# Altium PCB 2211B_SysArrosage_Auto_A.PcbDoc (part 2 of 2)
Units mm, origin at the board's own origin, x right, y up, seen from the top; angles counter-clockwise.
Board outline 107 x 107 mm, 2 copper layers (Top Layer, Bottom Layer), stack 1.586 mm thick; 94 components, 69 nets, 297 pads, 129 vias.
Unrouted connection lines stored in the file: 47.
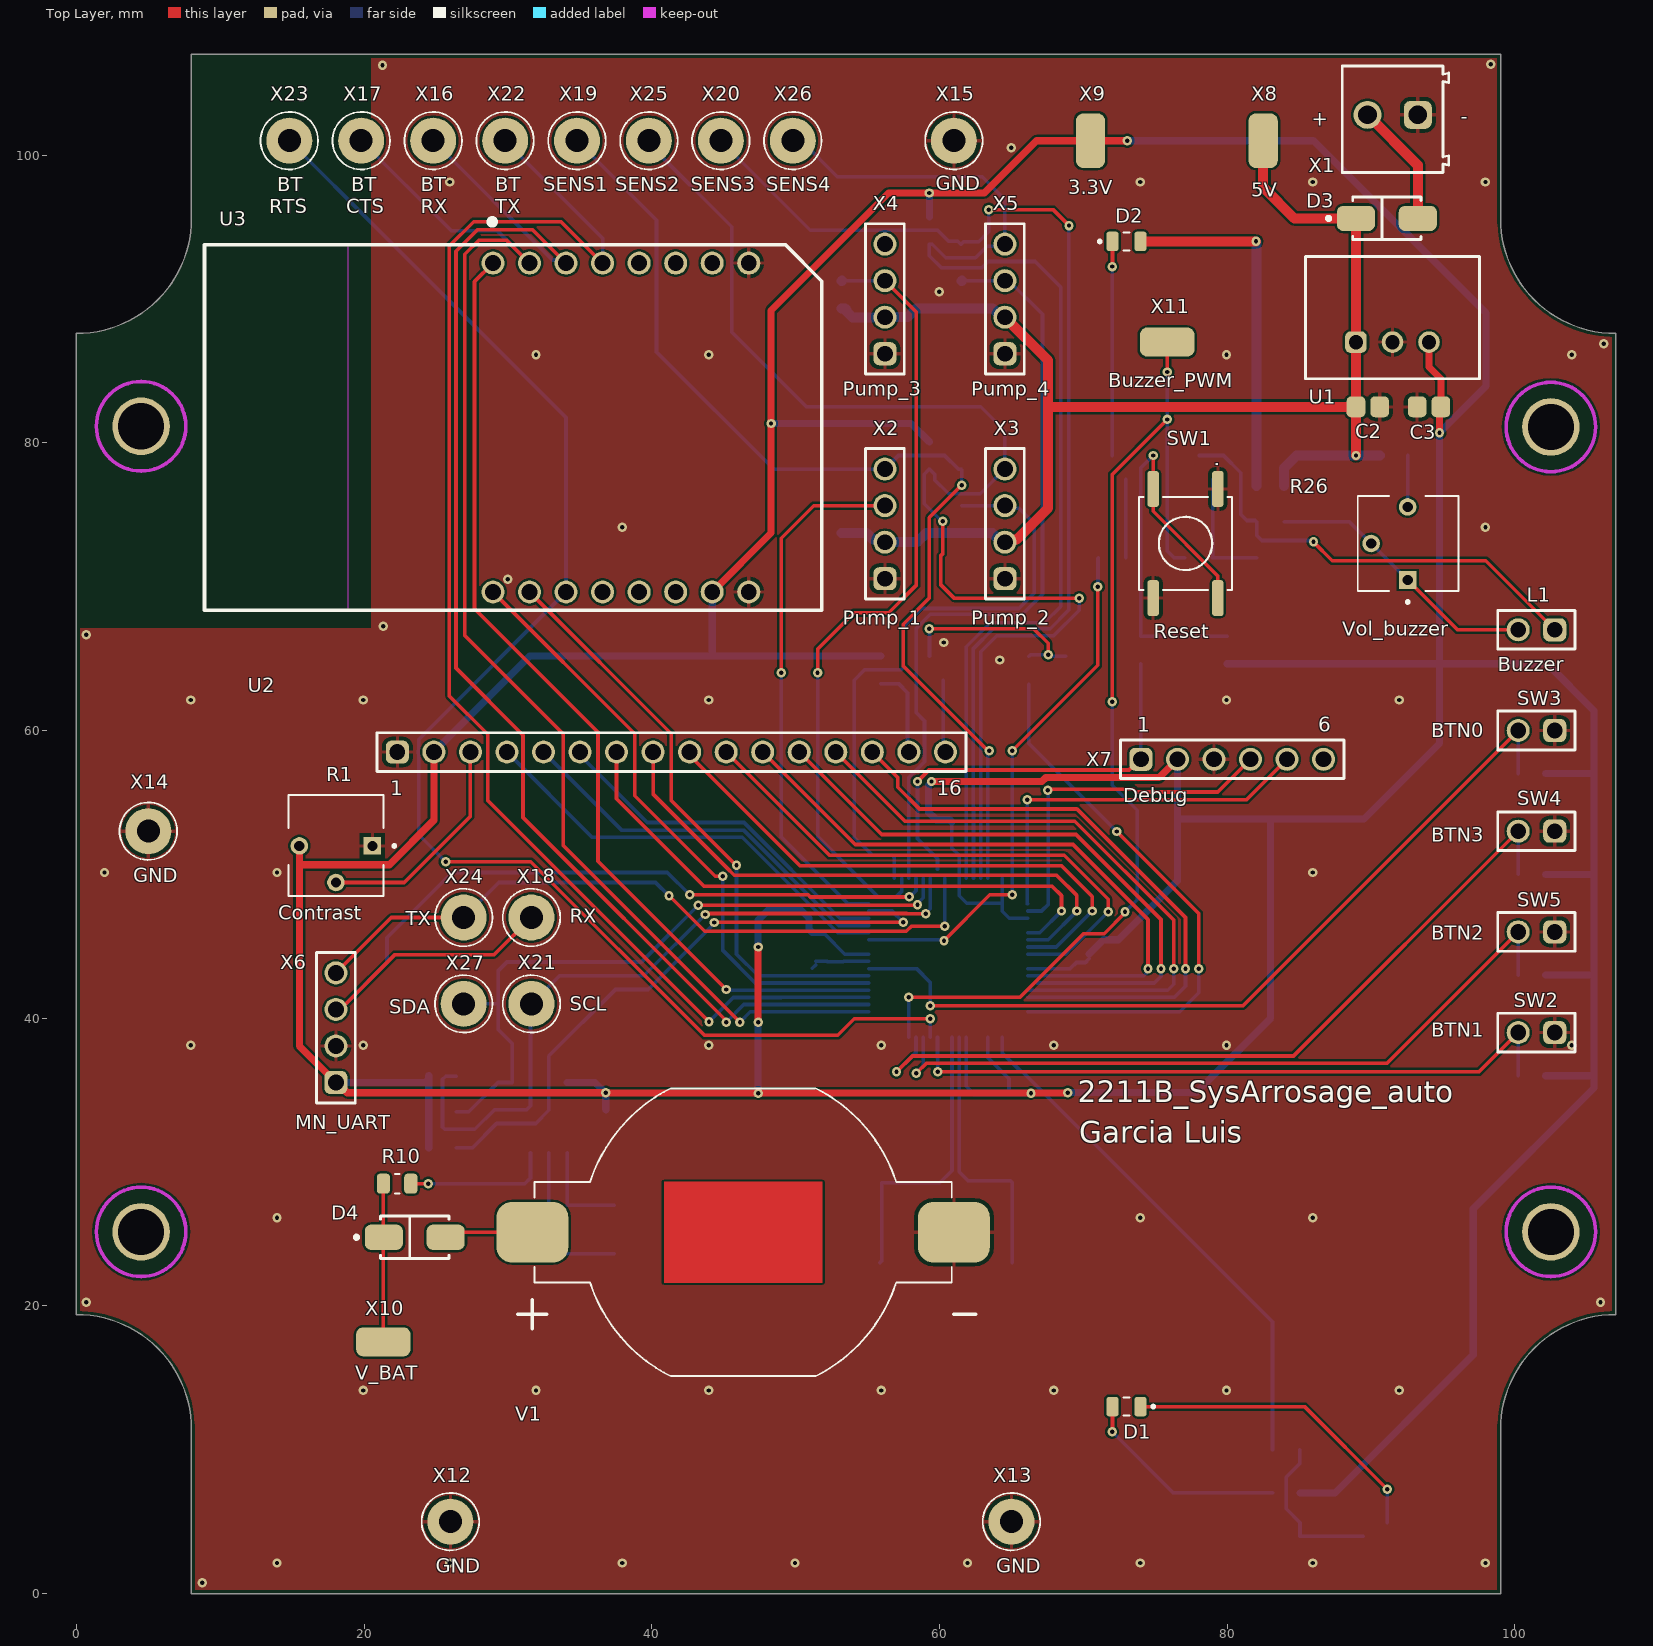
[diagram p0: Top Layer view]

## Via types
v1: diameter 0.65, hole 0.3, Top Layer to Bottom Layer, tented both sides, 66 vias
v2: diameter 0.65, hole 0.3, Top Layer to Bottom Layer, 63 vias

## Nets (pads, with @x,y where several pads share a name; then routed paths per layer and width w, separated by ;. In a path a pad name is that pad's centre, name@x,y a point inside that pad or via, vN(x,y) a via of type N, cw(c..) or ccw(c..) an arc to the next point about the centre after c; other vN are vias at no path point) (continued)
BTN0: (continued)
  Bottom Layer w0.254: U5.55 58.402,43.448 59.365,42.485 v1(59.365,40.855) ; R16.1 SW3.2
BTN1: R17.1 SW2.2 U5.42 | length 46.9
  Top Layer w0.254: v2(59.875,36.27) 97.5,36.27 SW2.2
  Bottom Layer w0.254: U5.42 59.865,37.245 59.875,37.235 v2(59.875,36.27) ; R17.1 SW2.2
BTN2: R19.1 SW5.2 U5.44 | length 51.6
  Top Layer w0.254: v2(58.389,36.175) 59.089,36.875 59.365,36.875 91.105,36.875 SW5.2
  Bottom Layer w0.254: v2(58.389,36.175) 58.389,36.221 58.865,36.697 U5.44 ; R19.1@100.23,43.002 SW5.2
BTN3: R18.1 SW4.2 U5.45 | length 56.1
  Top Layer w0.254: v2(57.015,36.27) 58.121,37.375 84.605,37.375 SW4.2
  Bottom Layer w0.254: v2(57.015,36.27) 58.363,37.618 58.363,38.671 U5.45 ; R18.1 100.23,50.001 SW4.2
Buzzer: R12.2 U5.46 X11.1 | length 73.1
  Top Layer w0.254: v1(57.865,41.458) 65.597,41.458 70.012,45.873 71.445,45.873 72.9,47.328 v2(72.9,47.4) ; v2(72,62) 72,77.795 v2(75.831,81.625) ; v2(75.831,84.92) X11.1
  Bottom Layer w0.254: U5.46 v1(57.865,41.458) ; v2(72,62) 72,56.202 73.738,54.464 73.738,48.238 v2(72.9,47.4) ; v2(75.831,84.92) v2(75.831,81.625) 75.831,72.475 76.305,72 R12.2
Contrast: R1.2 U2.3 | length 15.7
  Top Layer w0.254: R1.2 22.785,49.435 27.39,54.04 U2.3
GND: C2.1 C3.1 C5.1 C6.1 C7.1 C8.1 C9.1 C10.1 C11.1 C12.1 C13.1 C14.1 C15.1 C16.1 D5.1 D6.1 Q1.2 Q2.2 Q3.2 Q4.2 R1.1 R6.1 R13.2 R22.1 R23.1 SW1.1 SW1.3 SW2.1 SW3.1 SW4.1 SW5.1 U1.2 U2.1 U3.8 U3.9 U4.4 U5.9 U5.15 U5.20 U5.25 U5.41 V1.2 X1.1 X2.1 X3.1 X4.1 X5.1 X6.2 X7.3 X12.1 X13.1 X14.1 X15.1
  other v1: 8.75,0.75 13.95,2.125 25.95,2.125 37.95,2.125 49.95,2.125 61.95,2.125 73.95,2.125 85.95,2.125 97.95,2.125 19.95,14.125 31.95,14.125 43.95,14.125 55.95,14.125 67.95,14.125 79.95,14.125 91.95,14.125 0.675,20.25 105.95,20.25 13.95,26.125 73.95,26.125 85.95,26.125 7.95,38.125 19.95,38.125 43.95,38.125 55.95,38.125 67.95,38.125 79.95,38.125 103.95,38.125 1.95,50.125 13.95,50.125 85.95,50.125 7.95,62.125 19.95,62.125 43.95,62.125 79.95,62.125 91.95,62.125 64.178,64.897 60.285,66.121 0.675,66.65 21.34,67.241 29.988,70.504 37.95,74.125 97.95,74.125 31.95,86.125 43.95,86.125 79.95,86.125 103.95,86.125 106.175,86.875 59.988,90.504 25.95,98.125 73.95,98.125 85.95,98.125 97.95,98.125 64.988,100.504 21.275,106.25 98.328,106.325
LCD_BL: R5.1 U5.32 | length 38.8
  Top Layer w0.254: v2(72.325,52.975) 78.025,47.275 v2(78.025,43.445)
  Bottom Layer w0.254: U5.32 76.707,40.448 78.025,41.767 v2(78.025,43.445) ; 66.215,59.365 R5.1@66.215,63.225 ; 66.215,59.365 66.215,59.085 66.65,58.65 v2(72.325,52.975)
LCD_DB0: U2.7 U5.21 | length 41
  Top Layer w0.254: U2.7 37.55,55.255 43.627,49.178 67.821,49.178 68.477,48.522 v2(68.477,47.448)
  Bottom Layer w0.254: U5.21 66.977,45.948 v2(68.477,47.448)
LCD_DB1: U2.8 U5.22 | length 40.6
  Top Layer w0.254: U2.8 40.09,55.578 45.192,50.476 45.73,49.938 68.137,49.938 69.553,48.522 v2(69.553,47.448)
  Bottom Layer w0.254: U5.22 67.553,45.448 v2(69.553,47.448)
LCD_DB2: U2.9 U5.23 | length 38.8
  Top Layer w0.254: U2.9 42.63,58.265 50.297,50.598 68.477,50.598 70.623,48.452 v2(70.623,47.448)
  Bottom Layer w0.254: U5.23 68.123,44.948 v2(70.623,47.448)
LCD_DB3: U2.10 U5.24 | length 38.5
  Top Layer w0.254: U2.10 52.345,51.325 68.675,51.325 71.725,48.275 v2(71.725,47.4)
  Bottom Layer w0.254: U5.24 68.773,44.448 68.922,44.597 68.922,44.623 69.275,44.976 69.301,44.976 v2(71.725,47.4)
LCD_DB4: U2.11 U5.27 | length 43.7
  Top Layer w0.254: U2.11 54.135,52.075 69.275,52.075 74.494,46.856 v2(74.494,43.448)
  Bottom Layer w0.254: U5.27 74.206,42.948 74.419,43.16 74.419,43.372 v2(74.494,43.448)
LCD_DB5: U2.12 U5.28 | length 42.7
  Top Layer w0.254: U2.12 55.984,52.766 69.493,52.766 75.4,46.858 v2(75.4,43.445)
  Bottom Layer w0.254: U5.28@66.788,42.446 74.921,42.446 75.4,42.925 v2(75.4,43.445)
LCD_DB6: U2.13 U5.29 | length 43.1
  Top Layer w0.254: U2.13 57.6,53.69 69.408,53.69 76.275,46.823 v2(76.275,43.445)
  Bottom Layer w0.254: U5.29 75.869,41.948 76.275,42.354 v2(76.275,43.445)
LCD_DB7: U2.14 U5.30 | length 43
  Top Layer w0.254: U2.14 57.1,56.73 57.1,56.057 58.612,54.545 69.553,54.545 77.1,46.998 v2(77.1,43.445)
  Bottom Layer w0.254: U5.30 76.329,41.448 77.1,42.219 v2(77.1,43.445)
LCD_E: U2.6 U5.62 | length 25
  Bottom Layer w0.254: U2.6 35.01,58.284 39.688,53.606 46.415,53.606 53.072,46.948 U5.62
LCD_RS: U2.4 U5.60 | length 30.4
  Bottom Layer w0.254: U2.4 35.844,52.586 46.289,52.586 52.927,45.948 U5.60
LCD_RW: U2.5 U5.61 | length 27.6
  Bottom Layer w0.254: U2.5 37.895,53.075 46.373,53.075 53,46.448 U5.61
LED_STATUS: R21.2 U5.59 | length 37.2
  Top Layer w0.254: v1(60.309,45.393) 63.49,48.575 v1(65.05,48.575) ; v2(65.05,58.59) 71,64.54 v2(71,70)
  Bottom Layer w0.254: U5.59 55.092,45.446 60.256,45.446 v1(60.309,45.393) ; v1(65.05,48.575) v2(65.05,58.59) ; v2(71,70) 71.022,70.023 71.022,71.977 R21.2
LED_UC_TEST: R20.2 U5.33 | length 36.5
  Bottom Layer w0.254: U5.33 64.365,37.585 65.663,36.287 65.754,36.287 83.145,18.897 R20.2
MN_UART_RX: U5.4 X6.3 X18.1 | length 63.3
  Top Layer w0.254: X6.3 18.336,40.611 22.146,44.421 29.056,44.421 X18.1 ; v2(42.63,48.575) 50.883,48.575 51.032,48.425 57.88,48.425 v1(57.907,48.453)
  Bottom Layer w0.254: X6.3 18.336,40.611 21.59,43.865 21.59,45.584 26.133,50.126 41.079,50.126 v2(42.63,48.575) ; v1(57.907,48.453) 57.953,48.453 58.363,48.864 58.363,49.721 U5.4
MN_UART_TX: U5.8 X6.4 X24.1 | length 49.8
  Top Layer w0.254: X6.4 21.889,47 X24.1 ; v2(41.193,48.506) 41.211,48.506 43.672,46.045 57.696,46.045 58.051,46.4 v1(60.375,46.4)
  Bottom Layer w0.254: X24.1 29.36,49.435 40.264,49.435 v2(41.193,48.506) ; U5.8 60.365,47.835 60.375,47.825 v1(60.375,46.4)
NetC11_2: C11.2 R14.1 R15.1 SW1.2 SW1.4 | length 30.7
  Top Layer w0.254: v2(74.85,79.121) 74.85,75.245 79.35,70.745 SW1.4
  Bottom Layer w0.254: v2(74.85,79.121) 74,78.271 R15.1 C11.2 R14.1
NetC12_2: C12.2 U5.56 | length 4
  Bottom Layer w0.254: C12.2@51.159,43.473 C12.2@51.409,43.723 ; C12.2@51.409,43.948 52.19,43.948 52.206,43.932 53.316,43.932 53.333,43.948 U5.56
NetC13_2: C13.2 U4.1 Y1.4 | length 6.9
  Bottom Layer w0.254: U4.1 Y1.4 C13.2
NetC14_2: C14.2 U4.2 Y1.1 | length 11.1
  Bottom Layer w0.254: U4.2 32.84,24.347 33.565,23.622 Y1.1 C14.2
NetD1_1: D1.1 Q2.3 | length 21.8
  Top Layer w0.254: D1.1 85.37,13 v2(91.12,7.25)
  Bottom Layer w0.254: Q2.3 v2(91.12,7.25)
NetD1_2: D1.2 R3.1 | length 14.7
  Top Layer w0.254: v2(72,11.25) 72.025,11.275 D1.2
  Bottom Layer w0.254: v2(72,11.25) 76.25,7 R3.1
NetD2_1: D2.1 Q3.3 | length 14.9
  Top Layer w0.254: v2(72,92.25) 72.025,92.275 D2.1
  Bottom Layer w0.254: Q3.3 v2(72,92.25)
NetD2_2: D2.2 R4.1 | length 25
  Top Layer w0.7: D2.2 v2(82,94)
  Bottom Layer w0.7: v2(82,94) 82.045,93.955 R4.1
NetD3_1: D3.1 X1.2 | length 8.6
  Top Layer w0.7: X1.2 93.25,99.3 D3.1
NetD4_1: D4.1 V1.1 | length 6.2
  Top Layer w0.254: D4.1 26.02,25.122 V1.1
NetD4_2: D4.2 R10.2 X10.1 | length 11
  Top Layer w0.254: X10.1 R10.2
NetL1_1: L1.1 Q4.3 R29.1 | length 32
  Top Layer w0.254: v2(86,73.111) 87.311,71.8 97.97,71.8 L1.1
  Bottom Layer w0.254: Q4.3 79.74,79.117 80.94,77.917 80.94,75.016 81.353,74.603 81.942,74.603 R29.1 82.045,73.56 82.401,73.204 85.653,73.204 85.67,73.187 85.924,73.187 v2(86,73.111)
NetL1_2: L1.2 R26.1 R26.2 R29.2 | length 19.4
  Top Layer w0.254: R26.1 96.005,67 L1.2
  Bottom Layer w0.254: R29.2 88.505,74.5 R26.2 R26.1
NetQ1_1: Q1.1 R5.2 R6.2 | length 14
  Top Layer w0.254: v2(59.295,67.075) 66.538,67.075 67.553,66.06 v2(67.553,65.265)
  Bottom Layer w0.254: v2(59.295,67.075) 59.302,67.067 59.302,65.178 Q1.1 ; R5.2 66.31,65.265 v2(67.553,65.265) ; v2@67.553,65.17 R6.2
NetQ1_3: Q1.3 U2.16 | length 5.1
  Bottom Layer w0.254: Q1.3 60.26,58.65 U2.16
NetQ2_1: Q2.1 R20.1 R22.2 | length 11.2
  Bottom Layer w0.254: R20.1 85.055,9.055 84.1,8.1 84.1,5.894 85.065,4.929 85.065,3.99 Q2.1
NetQ3_1: Q3.1 R21.1 R23.2 | length 5.4
  Bottom Layer w0.254: Q3.1 72.95,72.005 R21.1
NetQ4_1: Q4.1 R12.1 R13.1 | length 8.6
  Bottom Layer w0.254: Q4.1 79,72.045 R12.1 R13.1
NetR2_1: R2.1 U2.15 | length 6.3
  Bottom Layer w0.254: R2.1 57.145,63.26 57.78,62.625 57.78,58.59 U2.15
NetR10_1: R10.1 U4.3 | length 10.2
  Top Layer w0.254: R10.1 v2(24.455,28.5)
  Bottom Layer w0.254: v2(24.455,28.5) 31.175,28.5 31.57,28.896 U4.3
NetR11_1: R11.1 R26.3 | length 3.6
  Bottom Layer w0.254: R26.3 R11.1
OSC1: C15.2 U5.39 Y2.2 | length 18.9
  Bottom Layer w0.254: U5.39 61.365,29.314 61.99,28.689 64.93,28.689 Y2.2 C15.2
OSC2: C16.2 U5.40 Y2.1 | length 20.1
  Bottom Layer w0.254: C16.2 55.973,23.119 Y2.1 60.022,28.553 60.865,29.396 U5.40
PGEC2: U5.17 X7.5 | length 26.5
  Top Layer w0.254: v2(66.089,55.18) 81.34,55.18 X7.5
  Bottom Layer w0.254: v2(66.089,55.18) 66.089,47.95 66.091,47.948 U5.17
PGED2: U5.18 X7.4 | length 24.7
  Top Layer w0.254: v2(67.528,55.841) 67.603,55.916 73.481,55.916 73.669,55.729 79.349,55.729 X7.4
  Bottom Layer w0.254: U5.18 67.098,47.448 67.553,47.903 67.553,55.815 v2(67.528,55.841)
PUMP_ON_OFF_1: R24.1 U5.64 X2.3 | length 39.9
  Top Layer w0.254: v2(48.995,64.025) 48.995,73.37 51.256,75.631 X2.3
  Bottom Layer w0.254: v2(48.995,64.025) 48.995,52.595 53.642,47.948 U5.64 ; R24.1 X2.3
PUMP_ON_OFF_2: R25.1 U5.1 X3.3 | length 42.8
  Bottom Layer w0.254: U5.1 56.865,51.176 56.717,51.325 55.336,51.325 54.075,52.586 54.075,63.5 54.79,64.215 57.326,64.215 57.475,64.364 57.475,67.191 58.768,68.485 65.514,68.485 66.58,69.551 66.58,74.382 65.519,75.443 64.732,75.443 X3.3 R25.1
PUMP_ON_OFF_3: R27.1 U5.2 X4.3 | length 55.5
  Top Layer w0.254: v2(51.525,64.025) 51.525,65.655 54.064,68.193 56.471,68.193 58.395,70.117 58.395,89.08 X4.3
  Bottom Layer w0.254: v2(51.525,64.025) 51.525,52.64 55.739,48.425 56.983,48.425 57.365,48.808 U5.2 ; R27.1@53.212,91.262 X4.3@56.197,91.262
  Bottom Layer w0.7: R27.1 R27.1@53.212,91.262 ; X4.3@56.197,91.262 X4.3
PUMP_ON_OFF_4: R28.1 U5.3 X5.3 | length 53.9
  Bottom Layer w0.254: U5.3 57.865,56.74 58.96,57.835 58.96,60.665 58.395,61.231 58.395,67.111 59.363,68.08 65.764,68.08 67.155,69.471 67.155,88.935 64.82,91.27 X5.3 ; R28.1@61.552,91.262 X5.3@64.537,91.262
  Bottom Layer w0.7: R28.1 R28.1@61.552,91.262 ; X5.3@64.537,91.262 X5.3
Reset: R15.2 U5.7 X7.1 | length 29.5
  Top Layer w0.254: v2(58.475,56.455) 59.27,57.25 73.178,57.25 73.928,58 X7.1
  Bottom Layer w0.254: v2(58.475,56.455) 58.475,52.477 59.865,51.087 U5.7@59.865,50.371 ; X7.1 R15.2
RTC_I2C_SCL: R8.1 U4.6 U5.6 X21.1 | length 51
  Top Layer w0.254: v2(43.708,47.211) 43.777,47.28 57.724,47.28 57.745,47.259 v1(59.041,47.259)
  Bottom Layer w0.254: R8.1@26.41,35.971 25.672,35.971 25.455,35.754 25.455,32.42 25.604,32.271 27.699,32.271 29.059,33.631 31.296,33.631 31.57,33.905 U4.6 31.57,40.935 X21.1 33.583,42.948 39.445,42.948 v2(43.708,47.211) ; v1(59.041,47.259) 59.041,47.281 59.365,47.605 U5.6
RTC_I2C_SDA: R7.1 U4.5 U5.5 X27.1 | length 48.4
  Top Layer w0.254: v2(43.225,47.85) 58.447,47.85 v1(58.475,47.878)
  Bottom Layer w0.254: R7.1 27.283,33.5 29.314,35.531 U4.5 30.3,38.246 29.314,39.232 29.314,41 ; X27.1 29.314,41 ; v2(43.225,47.85) 39.279,43.904 29.936,43.904 29.314,43.282 29.314,41 ; v1(58.475,47.878) 58.475,47.985 58.865,48.376 U5.5
RTC_MFP: R9.1 U4.7 U5.63 | length 42.5
  Top Layer w0.254: v2(44.34,46.648) 44.354,46.662 57.46,46.662 v1(57.474,46.677)
  Bottom Layer w0.254: R9.1 27.531,31 29.212,32.681 31.925,32.681 32.84,33.596 U4.7 32.84,37.366 37.475,42 39.758,42 44.34,46.582 v2(44.34,46.648) ; U5.63 56.703,47.448 v1(57.474,46.677)
SENSOR_ADC1: D5.2 U5.14 X2.4 X19.1 | length 75
  Top Layer w0.254: v2(61.552,77.058) 59.295,74.801 59.295,69.203 57.475,67.383 57.475,64.481 63.365,58.59 v2(63.468,58.59)
  Bottom Layer w0.254: X19.1 40.328,95.472 40.328,86.313 48.471,78.171 X2.4 57.155,79.121 60.345,79.121 61.295,78.171 D5.2 61.552,78.113 v2(61.552,77.058) ; U5.14 63.365,58.38 63.468,58.483 v2(63.468,58.59)
SENSOR_ADC2: D5.3 U5.13 X3.4 X25.1 | length 90.6
  Top Layer w0.254: v2(60.236,74.547) 60.236,72.305 60.098,72.167 60.098,70.114 61.009,69.203 v2(69.715,69.203) ; X3.4 X3.4@64.6,78.226
  Bottom Layer w0.254: X25.1 39.8,100.774 45.55,95.024 45.55,87.7 50.75,82.5 62.873,82.5 64.544,80.829 X3.4 62.829,76.455 60.642,76.455 59.659,77.439 59.659,77.806 D5.3 58.942,77.818 58.942,75.759 60.154,74.547 v2(60.236,74.547) ; U5.13 62.865,65.471 63.976,66.582 67.932,66.582 69.715,68.365 v2(69.715,69.203)
SENSOR_ADC3: D6.2 U5.12 X4.4 X20.1 | length 81
  Top Layer w0.254: v2(63.432,96.21) 67.89,96.21 v2(69,95.1)
  Bottom Layer w0.254: X20.1 51.022,94.778 56.205,94.778 ; X4.4 56.205,94.778 ; U5.12 62.365,54.685 62.357,54.693 62.357,65.7 63.732,67.075 67.7,67.075 68.975,68.35 68.975,95.075 v2(69,95.1) ; v2(63.432,96.21) 63.432,94.682 62.721,93.972 61.666,93.972 D6.2 61.277,94.017 60.627,94.017 59.867,94.778 56.205,94.778
SENSOR_ADC4: D6.3 U5.11 X5.4 X26.1 | length 82.8
  Bottom Layer w0.254: X26.1 50.4,101 52.9,98.5 62.965,98.5 64.545,96.92 X5.4 64.406,93.671 63.301,93.671 62.496,92.867 60.428,92.867 59.495,93.8 D6.3 59.295,93.011 60.141,92.165 62.95,92.165 63.385,92.6 66.647,92.6 68.425,90.822 68.425,68.628 67.282,67.485 63.525,67.485 61.865,65.825 61.865,64.535 U5.11
"VIN +5V": C2.2 D3.2 R4.2 R11.2 R24.2 R25.2 R27.2 R28.2 U1.1 X2.2 X3.2 X4.2 X5.2 X8.1 | length 99.7
  Top Layer w0.7: X3.2 64.717,73.263 65.357,73.263 67.553,75.459 67.553,82.425 ; X5.2 67.553,85.722 67.553,82.425 ; X8.1 82.5,97.765 84.665,95.6 D3.2 U1.1 C2.2 ; C2.2@88.65,82.125 88.95,82.425 C2.2 ; v2(88.95,79.117) C2.2@88.95,82.125 ; 67.553,82.425 67.628,82.5 C2.2
  Bottom Layer w0.7: R24.2 54.934,73.721 55.392,73.263 56.032,73.263 X2.2 58.441,73.091 59.071,73.721 63.671,73.721 64.301,73.091 X3.2 ; R27.2 53.435,89.345 53.545,89.235 53.545,89.131 53.955,88.721 X4.2@56.196,88.721 ; X4.2 57.78,88.73 58.395,89.345 R28.2 63.686,89.345 64.301,88.73 X5.2 ; R4.2 83.955,78.236 84.835,79.117 v2(88.95,79.117) R11.2
pads on no net: U3.5 U3.6 U3.7 U3.11 U3.12 U3.13 U5.31 U5.34 U5.36 U5.37 U5.47 U5.48 U5.58 X7.6 Y1.2 Y1.3

## Polygon pours and split planes (outlines as drawn)
GND on Top Layer "GND_L01_P000" (solid, remove dead copper, pour order 0): 8,0 99,0 99,11.4 107,19.4 107,87.6 99,107 20.484,107 20.484,67.116 0,67.116 0,19.4
GND on Bottom Layer "GND_L02_P001" (solid, remove dead copper, pour order 1): 8,0 99,0 107,19.4 107,87.6 99,107 20.486,107 20.486,67.114 0,67.114 0,19.4

## Keep-outs
Keep-Out Layer:
  circle w0.254: c102.5,81.1 r3.11
  circle w0.254: c102.5,25.15 r3.11
  circle w0.254: c4.5,25.15 r3.11
  circle w0.254: c4.5,81.15 r3.11

## Silkscreen, mask and mechanical layers (free items; w line width, h text height)
Top Overlay:
  text "-" at 96.225,102.2 h1
  text "+" at 85.89,102.033 h1
  text "GND" at 59.729,97.561 h1
  text "BT" at 13.95,97.5 h1
  text "BT" at 19.11,97.5 h1
  text "BT" at 23.95,97.5 h1
  text "BT" at 29.11,97.5 h1
  text "SENS1" at 32.45,97.5 h1
  text "SENS2" at 37.45,97.5 h1
  text "SENS3" at 42.7,97.5 h1
  text "SENS4" at 47.95,97.5 h1
  text "3.3V" at 68.95,97.275 h1
  text "5V" at 81.685,97.12 h1
  text "RTS" at 13.412,95.95 h1
  text "CTS" at 18.75,95.95 h1
  text "RX" at 23.95,95.95 h1
  text "TX" at 29.11,95.95 h1
  text "Buzzer_PWM" at 71.715,83.867 h1
  text "Pump_3" at 53.275,83.283 h1
  text "Pump_4" at 62.2,83.283 h1
  text "Pump_1" at 53.275,67.356 h1
  text "Pump_2" at 62.2,67.356 h1
  text "Vol_buzzer" at 87.982,66.589 h1
  text "Reset" at 74.88,66.422 h1
  text "Buzzer" at 98.81,64.127 h1
  text "BTN0" at 94.2,59.545 h1
  text "Debug" at 72.78,54.999 h1
  text "BTN3" at 94.2,52.275 h1
  text "GND" at 3.95,49.45 h1
  text "Contrast" at 14.025,46.848 h1
  text "RX" at 34.31,46.648 h1
  text "TX" at 22.9,46.475 h1
  text "BTN2" at 94.2,45.45 h1
  text "SCL" at 34.31,40.525 h1
  text "SDA" at 21.75,40.325 h1
  text "BTN1" at 94.2,38.7 h1
  text "2211B_SysArrosage_auto" at 69.627,34.145 h1.5
  text "MN_UART" at 15.2,32.278 h1
  text "Garcia Luis" at 69.708,31.329 h1.5
  text "V_BAT" at 19.385,14.867 h1
  text "GND" at 24.97,1.45 h1
  text "GND" at 63.95,1.45 h1
Outline:
  the board outline again, w0.254

## Dimensions
8,0 to 99,0 on Top Dimensions
0,19.4 to 107,19.4 on Top Dimensions
99,0 to 99,107 on Top Dimensions

## Text inside footprints (layer, text, board x,y; h text height)
U2: Top Overlay "1" at 21.81,55.5 h1.02; Top Overlay "16" at 59.81,55.5 h1.02
X7: Top Overlay "6" at 86.32,59.896 h1.02; Top Overlay "1" at 73.738,59.9 h1.02